# Allegro board 8880F5-0817_PLACEMENT.brd
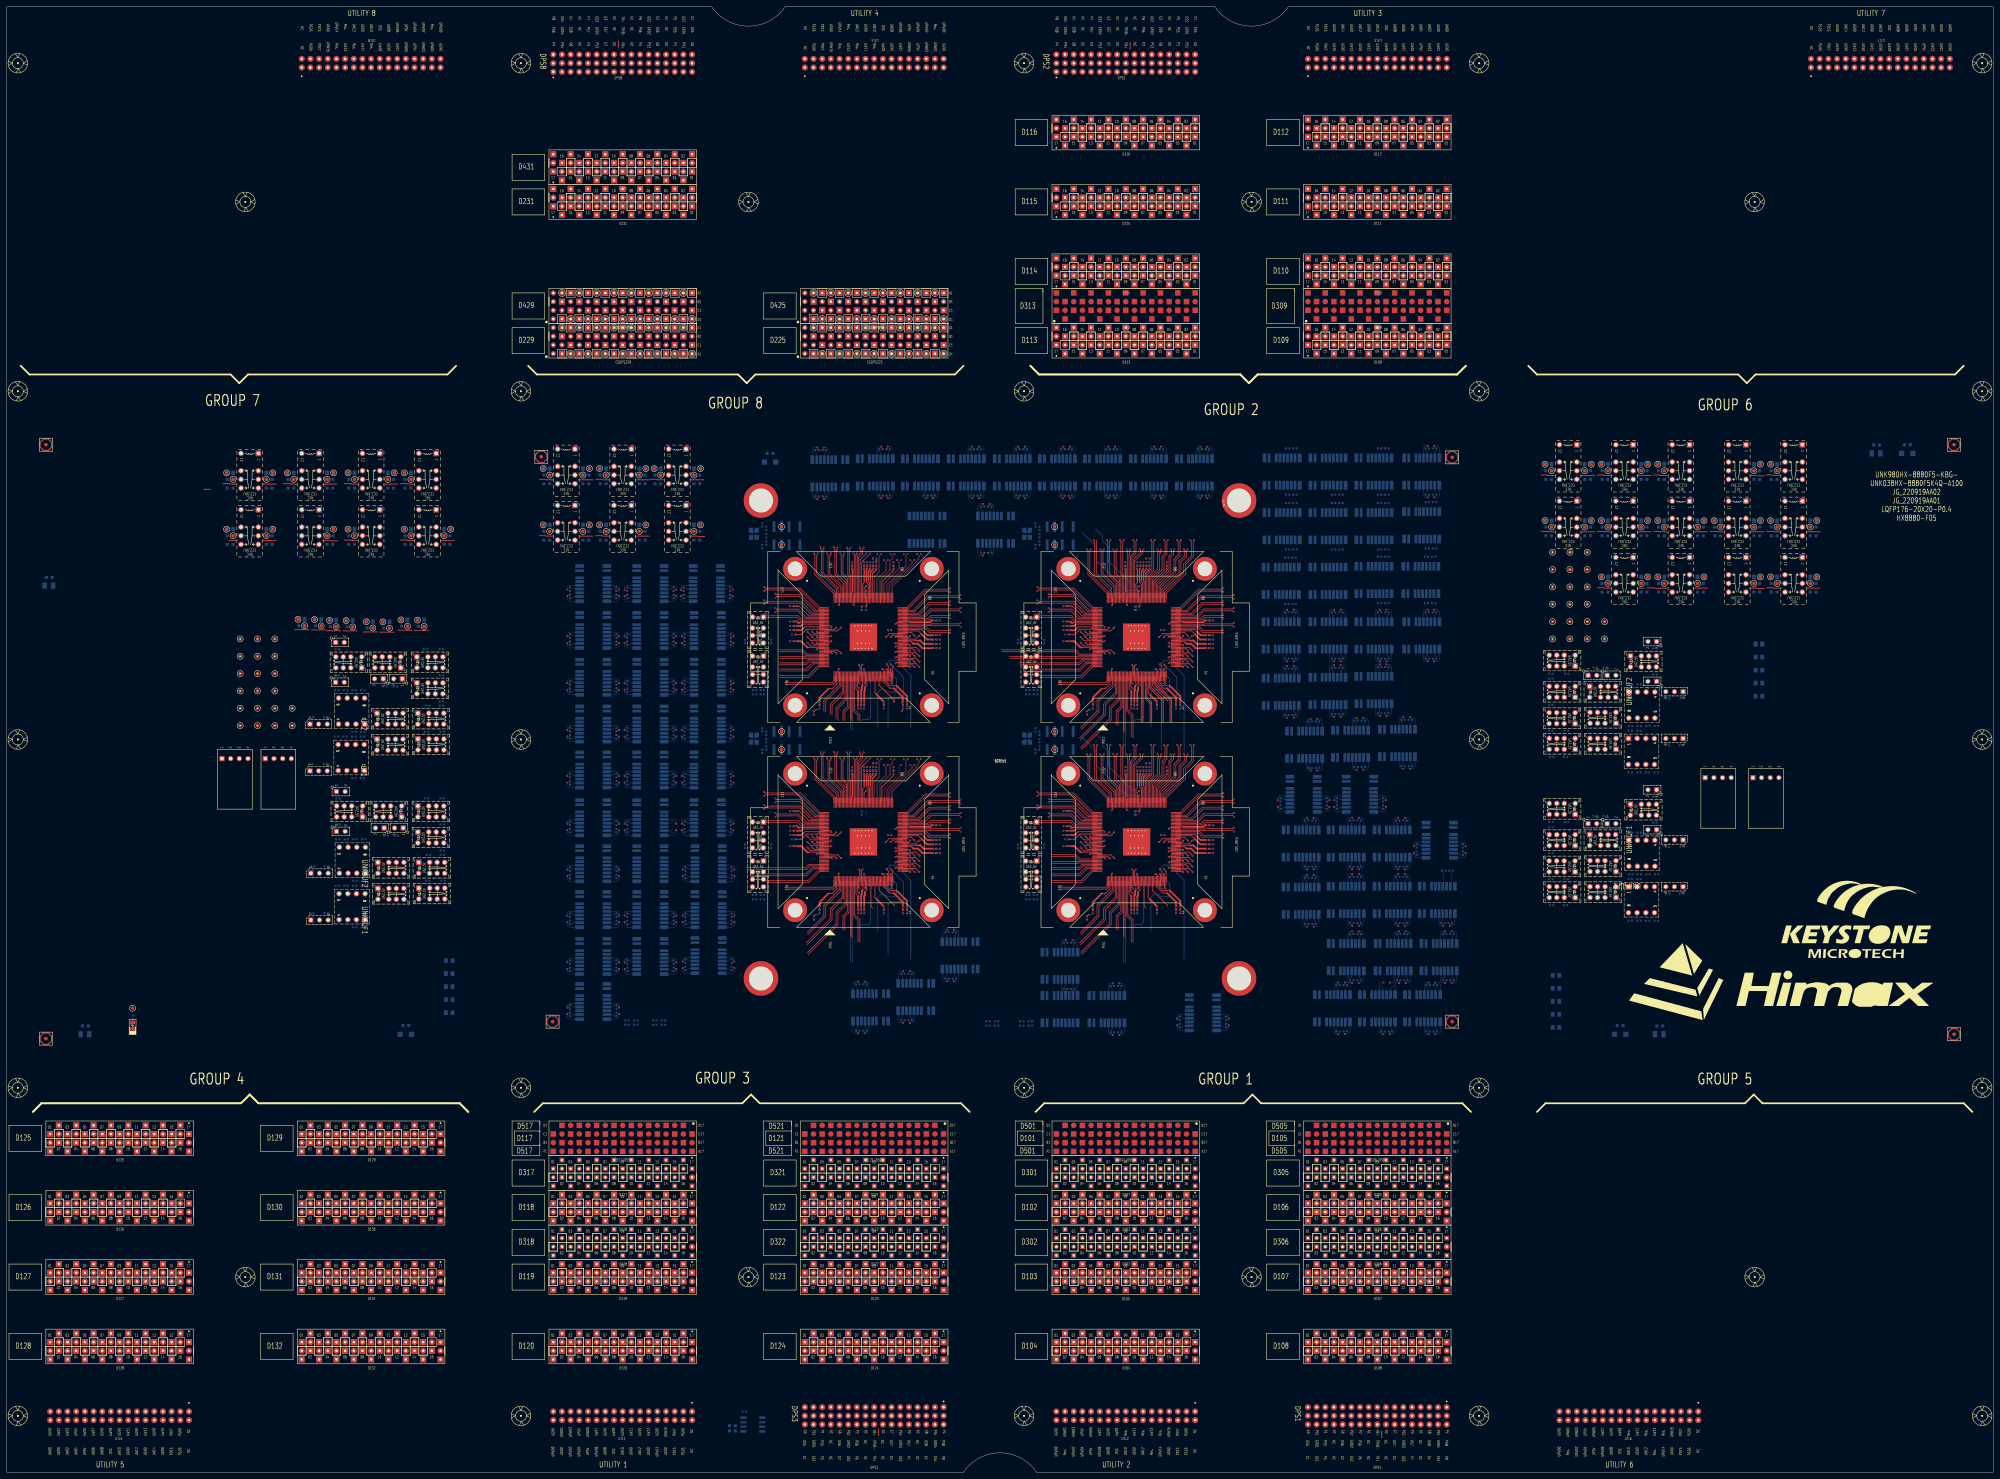
[diagram p0: board, top side]
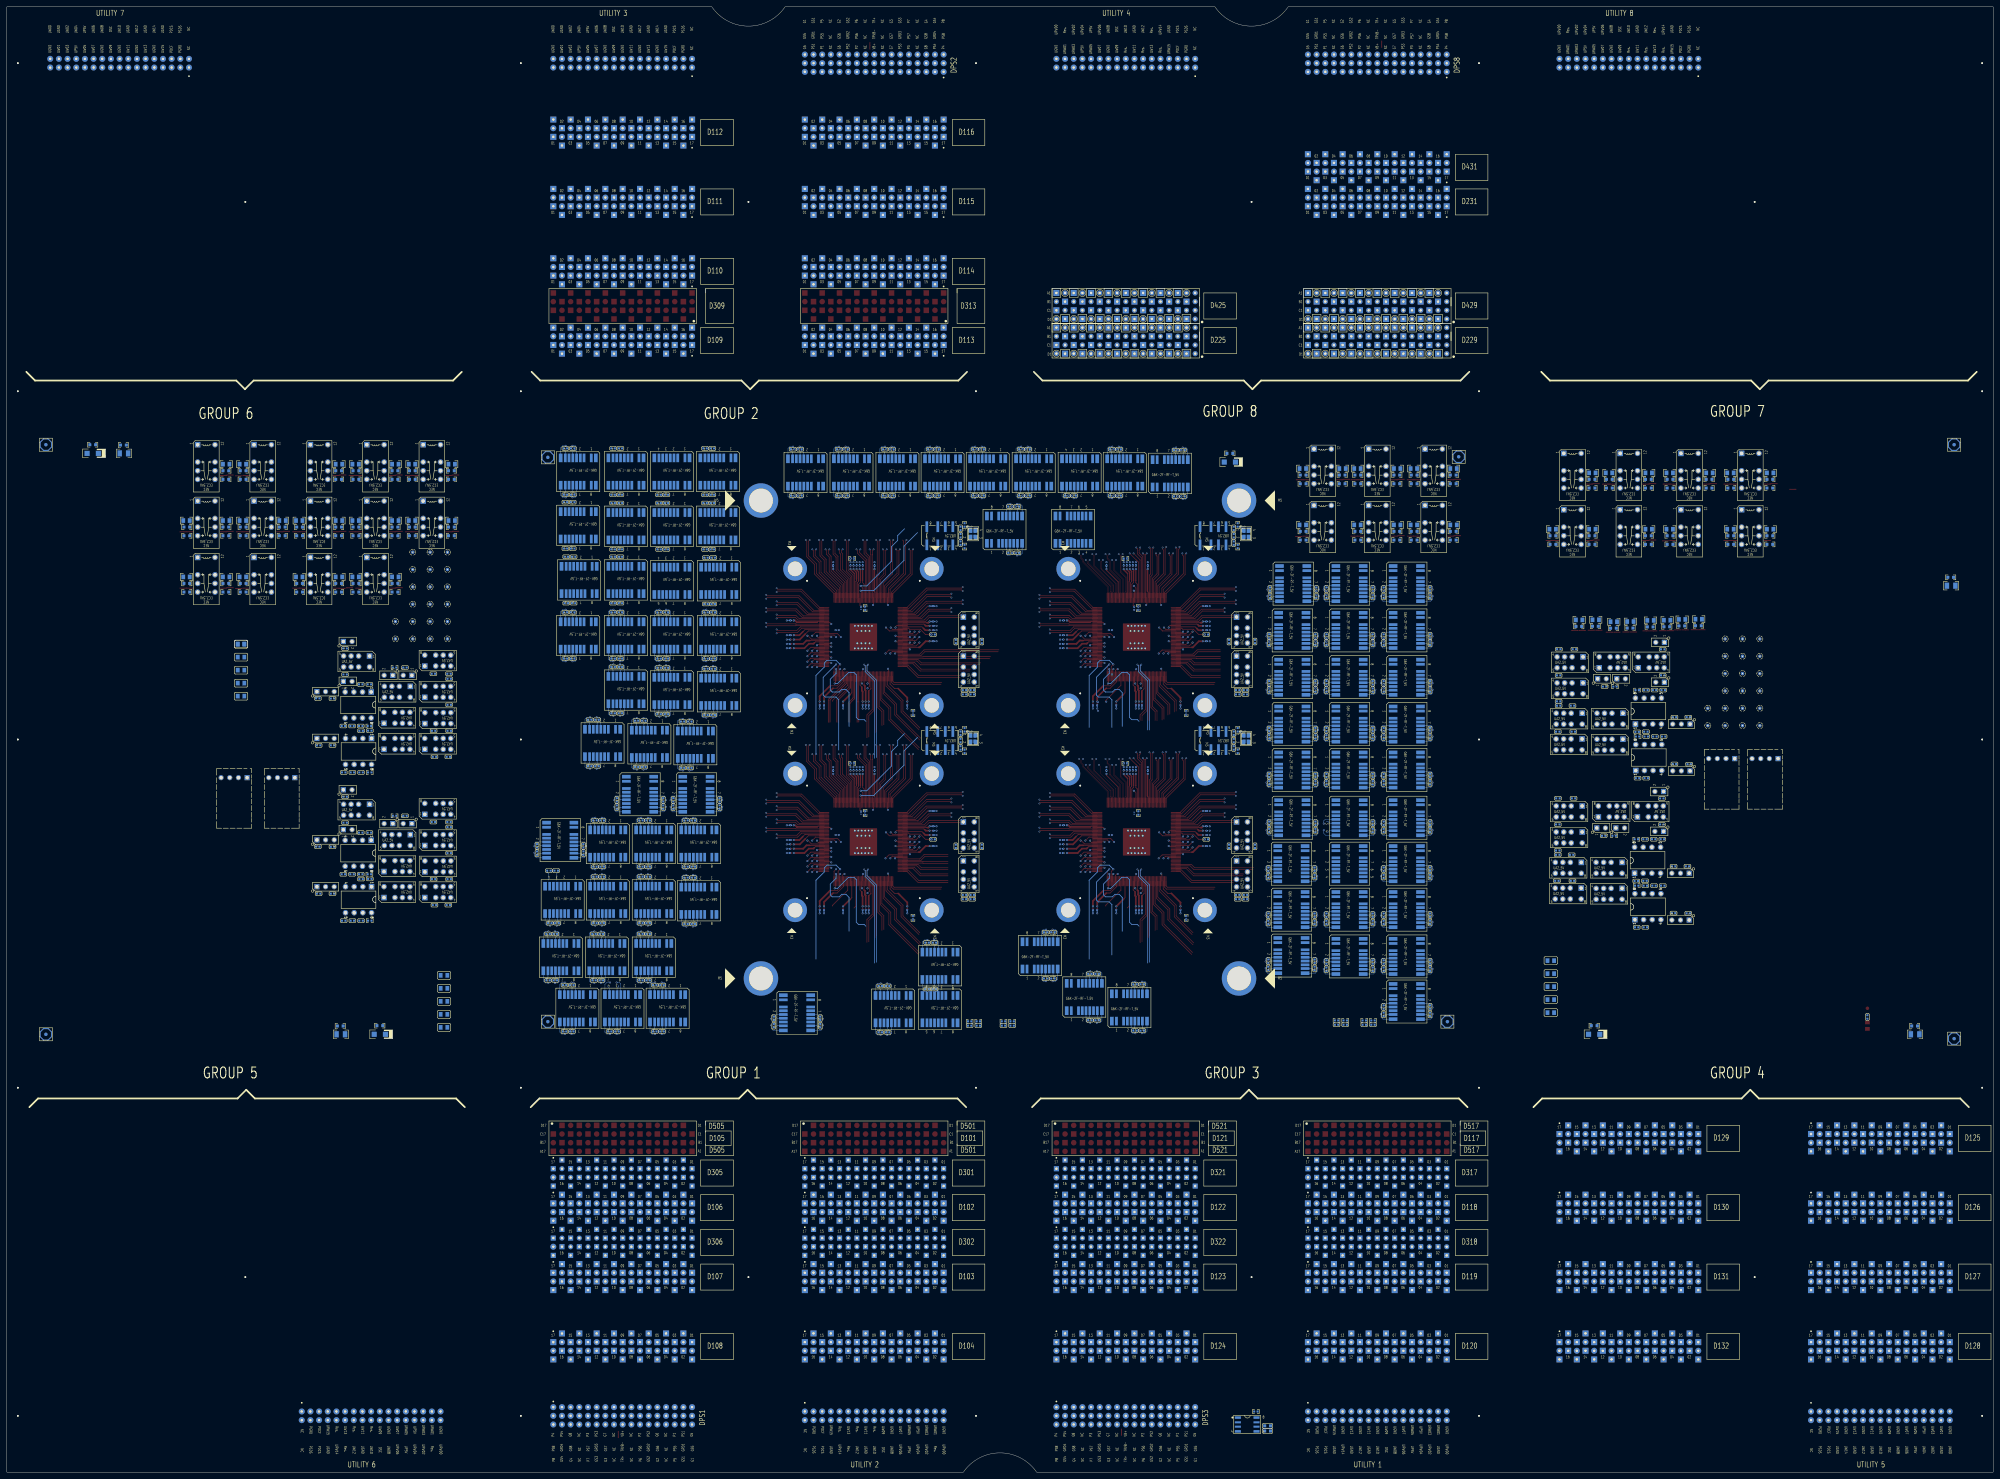
[diagram p1: board, bottom side, seen from below]

Outline 581.66 x 429.26 mm; copper layers: TOP, L02_DGND, L03_SIGNAL, L04_DGND, L05_SIGNAL, L06_DGND, L07_SIGNAL, L08_DGND, L09_SIGNAL, L10_DGND, L11_POWER, L12_DGND, L13_POWER, L14_DGND, L15_POWER, L16_DGND, L17_5V, L18_CBIT, L19_DGND, L20_POWER, L21_DGND, L22_POWER, L23_DGND, L24_POWER, L25_DGND, L26_SIGNAL, L27_DGND, L28_SIGNAL, L29_DGND, L30_SIGNAL, L31_DGND, L32_SIGNAL, L33_DGND, BOTTOM. Coordinates in mm from the lower left corner of the outline.

## Design rules (mm)
net group DIFFPAIR0: nets S1_2TX_100DCH007+ S1_2TX_100DCH007-
net group DIFFPAIR1: nets S1_2TX_100DCH006+ S1_2TX_100DCH006-
net group DIFFPAIR2: nets S1_2TX_100DCH005+ S1_2TX_100DCH005-
net group DIFFPAIR3: nets S1_2TX_100DCH004+ S1_2TX_100DCH004-
net group DIFFPAIR4: nets S1_2TX_100DCH003+ S1_2TX_100DCH003-
net group DIFFPAIR5: nets S1_2TX_100DCH002+ S1_2TX_100DCH002-
net group DIFFPAIR6: nets S1_2TX_100DCH001+ S1_2TX_100DCH001-
net group DIFFPAIR_85_1: nets S1_RX_85DCH001+ S1_RX_85DCH001-
net group DIFFPAIR_85_2: nets S1_RX_85DCH002+ S1_RX_85DCH002-
net group DIFFPAIR_85_3: nets S1_RX_85DCH003+ S1_RX_85DCH003-
net group DIFFPAIR_85_4: nets S1_RX_85DCH004+ S1_RX_85DCH004-

## Placement (name value [footprint] x y rotation side)
BD29  BD120-3A-S8  [FB0805]  129.54 134.62 180 bottom
BD30  BD120-3A-S8  [FB0805]  129.54 146.05 180 bottom
BD31  BD120-3A-S8  [FB0805]  129.54 142.24 0 bottom
BD32  BD120-3A-S8  [FB0805]  513.08 238.76 180 bottom
BD33  BD120-3A-S8  [FB0805]  513.08 242.57 180 bottom
BD34  BD120-3A-S8  [FB0805]  453.64 145.54 0 bottom
BD35  BD120-3A-S8  [FB0805]  453.64 137.92 180 bottom
BD36  BD120-3A-S8  [FB0805]  129.54 138.43 180 bottom
BD37  BD120-3A-S8  [FB0805]  453.64 130.3 180 bottom
BD38  BD120-3A-S8  [FB0805]  513.08 242.57 180 bottom
BD39  BD120-3A-S8  [FB0805]  453.64 141.73 0 bottom
BD40  BD120-3A-S8  [FB0805]  453.64 134.11 180 bottom
BD41  BD120-3A-S8  [FB0805]  513.08 234.95 180 bottom
BD42  BD120-3A-S8  [FB0805]  513.08 231.14 180 bottom
BD43  BD120-3A-S8  [FB0805]  513.08 227.33 180 bottom
BD44  BD120-3A-S8  [FB0805]  129.54 149.86 180 bottom
BR902  330-1-S4  [R0402]  36.83 133.35 270 bottom
C3  0.1U-16-X-S4-MU  [C0402]  184.15 132.33 180 bottom
C4  0.1U-16-X-S4-MU  [C0402]  181.61 132.33 180 bottom
C5  22P-50-N-S4-AVX  [C0402]  221.21 277.48 90 bottom
C6  22P-50-N-S4-AVX  [C0402]  221.21 271.16 270 bottom
C7  0.1U-16-X-S4-MU  [C0402]  110.74 230.12 0 bottom
C8  0.1U-16-X-S4-MU  [C0402]  104.14 215.5 180 bottom
C9  0.1U-16-X-S4-MU  [C0402]  104.24 229.1 180 bottom
CA1  NC/10U-10-X6S-S6-MU  [C0603]  186.05 292.1 0 bottom
CA2  NC/47U-10-X5R-S8-TDK  [C0805]  186.16 294 0 bottom
CA3  NC/10U-10-X6S-S6-MU  [C0603]  174.62 292.1 180 bottom
CA4  NC/47U-10-X5R-S8-TDK  [C0805]  174.52 294 180 bottom
CA5  NC/10U-10-X6S-S6-MU  [C0603]  117.47 290.83 180 bottom
CA6  NC/47U-10-X5R-S8-TDK  [C0805]  117.37 292.74 180 bottom
CA7  NC/10U-10-X6S-S6-MU  [C0603]  169.54 292.1 0 bottom
CA8  NC/47U-10-X5R-S8-TDK  [C0805]  169.65 294 0 bottom
CA9  NC/10U-10-X6S-S6-MU  [C0603]  158.11 292.1 180 bottom
CA10  NC/47U-10-X5R-S8-TDK  [C0805]  158.01 294 180 bottom
CA11  NC/10U-10-X6S-S6-MU  [C0603]  186.05 275.59 0 bottom
CA12  NC/47U-10-X5R-S8-TDK  [C0805]  186.16 277.5 0 bottom
CA13  NC/47U-10-X5R-S8-TDK  [C0805]  202.16 294 0 bottom
CA14  NC/10U-10-X6S-S6-MU  [C0603]  202.06 292.1 0 bottom
CA15  NC/47U-10-X5R-S8-TDK  [C0805]  190.53 294 180 bottom
CA16  NC/10U-10-X6S-S6-MU  [C0603]  190.63 292.1 180 bottom
CA17  NC/47U-10-X5R-S8-TDK  [C0805]  169.65 277.5 0 bottom
CA18  NC/10U-10-X6S-S6-MU  [C0603]  169.54 275.59 0 bottom
CA19  NC/47U-10-X5R-S8-TDK  [C0805]  100.34 249.52 180 bottom
CA20  NC/10U-10-X6S-S6-MU  [C0603]  100.44 247.61 180 bottom
CA21  10U-10-X6S-S6-MU  [C0603]  186.05 289.56 0 bottom
CA22  10U-10-X6S-S6-MU  [C0603]  174.62 289.56 180 bottom
CA23  10U-10-X6S-S6-MU  [C0603]  117.47 288.29 180 bottom
CA24  10U-10-X6S-S6-MU  [C0603]  169.54 289.56 0 bottom
CA25  10U-10-X6S-S6-MU  [C0603]  158.11 289.56 180 bottom
CA26  10U-10-X6S-S6-MU  [C0603]  186.05 273.05 0 bottom
CA27  10U-10-X6S-S6-MU  [C0603]  202.06 289.56 0 bottom
CA28  10U-10-X6S-S6-MU  [C0603]  190.63 289.56 180 bottom
CA29  10U-10-X6S-S6-MU  [C0603]  169.54 273.05 0 bottom
CA30  NC/47U-10-X5R-S8-TDK  [C0805]  95.47 249.57 180 bottom
CA31  10U-10-X6S-S6-MU  [C0603]  95.57 247.66 180 bottom
CA32  NC/10U-10-X6S-S6-MU  [C0603]  202.06 275.59 0 bottom
CA33  NC/47U-10-X5R-S8-TDK  [C0805]  202.16 277.5 0 bottom
CA34  10U-10-X6S-S6-MU  [C0603]  202.06 273.05 0 bottom
CA35  NC/10U-10-X6S-S6-MU  [C0603]  174.62 275.59 180 bottom
CA36  NC/47U-10-X5R-S8-TDK  [C0805]  174.52 277.5 180 bottom
CA37  10U-10-X6S-S6-MU  [C0603]  174.62 273.05 180 bottom
CA38  NC/10U-10-X6S-S6-MU  [C0603]  158.11 275.59 180 bottom
CA39  NC/47U-10-X5R-S8-TDK  [C0805]  158.01 277.5 180 bottom
CA40  10U-10-X6S-S6-MU  [C0603]  158.11 273.05 180 bottom
CB1  0.1U-25-X-S6  [C0603]  116.84 130.81 0 bottom
CB2  10U-16-T-SA  [CODE_A]  116.84 128.27 0 bottom
CB3  0.1U-25-X-S6  [C0603]  472.44 130.81 0 bottom
CB4  10U-16-T-SA  [CODE_A]  472.44 128.27 0 bottom
CB5  0.1U-25-X-S6  [C0603]  556.51 300.99 0 bottom
CB6  10U-16-T-SA  [CODE_A]  556.51 298.45 0 bottom
CB7  0.1U-25-X-S6  [C0603]  223.52 298.45 0 bottom
CB8  10U-16-T-SA  [CODE_A]  223.52 295.91 0 bottom
CB9  0.1U-25-X-S6  [C0603]  23.01 130.71 0 bottom
CB10  10U-25-X7R-SA  [C1206]  22.86 128.27 0 bottom
CB11  0.1U-25-X-S6  [C0603]  484.02 130.71 0 bottom
CB12  10U-25-X7R-SA  [C1206]  483.87 128.27 0 bottom
CB13  0.1U-25-X-S6  [C0603]  547.52 300.89 0 bottom
CB14  10U-25-X7R-SA  [C1206]  547.37 298.45 0 bottom
CB15  0.1U-25-X-S6  [C0603]  12.45 262.13 0 bottom
CB16  10U-25-X7R-SA  [C1206]  12.3 259.69 0 bottom
CB19  0.1U-25-X7R-S4-MU  [C0402]  215.9 17.78 180 bottom
CC1  0.47U-10-X6S-S2-TY  [C0201]  237.98 224.12 90 bottom
CC2  4.7U-10-X6T-S4-MU  [C0402]  236.32 222.4 270 bottom
CC4  0.47U-10-X6S-S2-TY  [C0201]  229.81 247.93 0 bottom
CC6  0.47U-10-X6S-S2-TY  [C0201]  250.17 224.12 90 bottom
CC7  0.47U-10-X6S-S2-TY  [C0201]  229.81 246.66 0 bottom
CC8  0.47U-10-X6S-S2-TY  [C0201]  263.63 224.12 90 bottom
CC9  0.47U-10-X6S-S2-TY  [C0201]  254.61 266.16 270 bottom
CC11  0.47U-10-X6S-S2-TY  [C0201]  251.06 224.12 90 bottom
CC13  0.47U-10-X6S-S2-TY  [C0201]  256.77 224.12 90 bottom
CC15  4.7U-2.5-X6S-S2-MU  [C0201]  259.65 264.95 90 bottom
CC16  NC/4.7U-2.5-X6S-S2-MU  [C0201]  271.64 249.5 0 bottom
CC17  4.7U-2.5-X6S-S2-MU  [C0201]  229.81 253.69 0 bottom
CC19  0.47U-10-X6S-S2-TY  [C0201]  252.83 266.16 270 bottom
CC20  4.7U-10-X6T-S4-MU  [C0402]  254.11 267.66 0 bottom
CC22  0.47U-10-X6S-S2-TY  [C0201]  251.05 266.16 270 bottom
CC23  4.7U-10-X6T-S4-MU  [C0402]  250.34 253.09 270 bottom
CC25  0.47U-10-X6S-S2-TY  [C0201]  272.85 245.18 180 bottom
CC26  0.47U-10-X6S-S2-TY  [C0201]  253.72 266.16 270 bottom
CC27  0.47U-10-X6S-S2-TY  [C0201]  272.85 249.5 180 bottom
CC28  0.47U-10-X6S-S2-TY  [C0201]  259.65 266.16 270 bottom
CC29  0.47U-10-X6S-S2-TY  [C0201]  231.03 253.69 180 bottom
CC30  0.47U-10-X6S-S2-TY  [C0201]  229.81 243.41 0 bottom
CC31  0.47U-10-X6S-S2-TY  [C0201]  249.28 224.12 90 bottom
CC32  0.47U-10-X6S-S2-TY  [C0201]  262.36 224.12 90 bottom
CC33  0.47U-10-X6S-S2-TY  [C0201]  272.85 243.91 180 bottom
CC34  0.47U-10-X6S-S2-TY  [C0201]  251.94 266.16 270 bottom
CC35  0.47U-10-X6S-S2-TY  [C0201]  272.85 241.37 180 bottom
CC36  0.47U-10-X6S-S2-TY  [C0201]  272.85 242.64 180 bottom
CC37  0.47U-10-X6S-S2-TY  [C0201]  247.57 264.95 90 bottom
CC38  NC/4.7U-2.5-X6S-S2-MU  [C0201]  247.57 266.16 270 bottom
CC39  0.47U-10-X6S-S2-TY  [C0201]  231.03 249.2 180 bottom
CC40  4.7U-2.5-X6S-S2-MU  [C0201]  258.5 246.67 180 bottom
CC41  4.7U-2.5-X6S-S2-MU  [C0201]  229.81 249.2 0 bottom
CC42  4.7U-2.5-X6S-S2-MU  [C0201]  251.54 253.03 90 bottom
CD1  0.1U-10-X7R-S2-MU  [C0201]  237.98 225.34 270 top
CD3  0.1U-10-X7R-S2-MU  [C0201]  271.64 241.37 0 top
CD4  0.1U-10-X7R-S2-MU  [C0201]  254.61 264.95 90 top
CD5  0.1U-10-X7R-S2-MU  [C0201]  263.63 225.34 270 top
CD6  0.1U-10-X7R-S2-MU  [C0201]  231.03 246.66 180 top
CD7  0.1U-10-X7R-S2-MU  [C0201]  271.64 242.64 0 top
CD8  0.1U-10-X7R-S2-MU  [C0201]  251.06 225.34 270 top
CD9  0.1U-10-X7R-S2-MU  [C0201]  256.77 225.34 270 top
CD10  0.1U-10-X7R-S2-MU  [C0201]  271.64 249.5 0 top
CD11  0.1U-10-X7R-S2-MU  [C0201]  259.65 264.95 90 top
CD12  0.1U-10-X7R-S2-MU  [C0201]  231.03 253.69 180 top
CD13  0.1U-10-X7R-S2-MU  [C0201]  252.83 264.95 90 top
CD14  0.1U-10-X7R-S2-MU  [C0201]  251.05 264.95 90 top
CD15  0.1U-10-X7R-S2-MU  [C0201]  271.64 245.18 0 top
CD16  0.1U-10-X7R-S2-MU  [C0201]  253.72 264.95 90 top
CD17  0.1U-10-X7R-S2-MU  [C0201]  231.03 247.93 180 top
CD18  0.1U-10-X7R-S2-MU  [C0201]  251.94 264.95 90 top
CD19  0.1U-10-X7R-S2-MU  [C0201]  231.03 243.41 180 top
CD20  0.1U-10-X7R-S2-MU  [C0201]  271.64 243.91 0 top
CD21  0.1U-10-X7R-S2-MU  [C0201]  262.36 225.34 270 top
CD22  0.1U-10-X7R-S2-MU  [C0201]  249.28 225.34 270 top
CD23  0.1U-10-X7R-S2-MU  [C0201]  250.17 225.34 270 top
CD24  0.1U-10-X7R-S2-MU  [C0201]  247.57 264.95 90 top
CD25  0.1U-10-X7R-S2-MU  [C0201]  231.03 249.2 180 top
CSDPS225  V93K_CSDPS_DPS32  [PG_VG93K_PF_DPS32_G8D225]  254 331.47 0 top
CSDPS229  V93K_CSDPS_DPS32  [PG_VG93K_PF_DPS32_G8D229]  180.34 331.47 0 top
CSDPS425  V93K_CSDPS_DPS32  [PG_VG93K_PF_DPS32_G8D425]  254 341.63 0 top
CSDPS429  V93K_CSDPS_DPS32  [PG_VG93K_PF_DPS32_G8D429]  180.34 341.63 0 top
D101/D501  V93K_PS1600 HD  [PG_VG93K_F_HSM_G1D101_501_ND]  327.66 97.79 0 top
D102  V93K_CH  [PG_VG93K_F_G1D102]  327.66 77.47 0 top
D103  V93K_CH  [PG_VG93K_F_G1D103]  327.66 57.15 0 top
D104  V93K_CH  [PG_VG93K_F_G1D104]  327.66 36.83 0 top
D105/D505  V93K_PS1600 HD  [PG_VG93K_F_HSM_G1D105_505_ND]  401.32 97.79 0 top
D106  V93K_CH  [PG_VG93K_F_G1D106]  401.32 77.47 0 top
D107  V93K_CH  [PG_VG93K_F_G1D107]  401.32 57.15 0 top
D108  V93K_CH  [PG_VG93K_F_G1D108]  401.32 36.83 0 top
D109  V93K_CH  [PG_VG93K_F_G2D109]  401.32 331.47 0 top
D110  V93K_CH  [PG_VG93K_F_G2D110]  401.32 351.79 0 top
D111  V93K_CH  [PG_VG93K_F_G2D111]  401.32 372.11 0 top
D112  V93K_CH  [PG_VG93K_F_G2D112]  401.32 392.43 0 top
D113  V93K_CH  [PG_VG93K_F_G2D113]  327.66 331.47 0 top
D114  V93K_CH  [PG_VG93K_F_G2D114]  327.66 351.79 0 top
D115  V93K_CH  [PG_VG93K_F_G2D115]  327.66 372.11 0 top
D116  V93K_CH  [PG_VG93K_F_G2D116]  327.66 392.43 0 top
D117/D517  V93K_PS1600 HD  [PG_VG93K_F_HSM_G3D117_517_ND]  180.34 97.79 0 top
D118  V93K_CH  [PG_VG93K_F_G3D118]  180.34 77.47 0 top
D119  V93K_CH  [PG_VG93K_F_G3D119]  180.34 57.15 0 top
D120  V93K_CH  [PG_VG93K_F_G3D120]  180.34 36.83 0 top
D121/D521  V93K_PS1600 HD  [PG_VG93K_F_HSM_G3D121_521_ND]  254 97.79 0 top
D122  V93K_CH  [PG_VG93K_F_G3D122]  254 77.47 0 top
D123  V93K_CH  [PG_VG93K_F_G3D123]  254 57.15 0 top
D124  V93K_CH  [PG_VG93K_F_G3D124]  254 36.83 0 top
D125  V93K_CH  [PG_VG93K_F_G4D125]  33.02 97.79 0 top
D126  V93K_CH  [PG_VG93K_F_G4D126]  33.02 77.47 0 top
D127  V93K_CH  [PG_VG93K_F_G4D127]  33.02 57.15 0 top
D128  V93K_CH  [PG_VG93K_F_G4D128]  33.02 36.83 0 top
D129  V93K_CH  [PG_VG93K_F_G4D129]  106.68 97.79 0 top
D130  V93K_CH  [PG_VG93K_F_G4D130]  106.68 77.47 0 top
D131  V93K_CH  [PG_VG93K_F_G4D131]  106.68 57.15 0 top
D132  V93K_CH  [PG_VG93K_F_G4D132]  106.68 36.83 0 top
D231  V93K_CH  [PG_VG93K_F_G8D231]  180.34 372.11 0 top
D301  V93K_CH  [PG_VG93K_F_G1D301]  327.66 87.63 0 top
D302  V93K_CH  [PG_VG93K_F_G1D302]  327.66 67.31 0 top
D305  V93K_CH  [PG_VG93K_F_G1D305]  401.32 87.63 0 top
D306  V93K_CH  [PG_VG93K_F_G1D306]  401.32 67.31 0 top
D309  V93K_PSSL  [PG_VG93K_F_PSSL_G2D309_ND]  401.32 341.63 0 top
D313  V93K_PSSL  [PG_VG93K_F_PSSL_G2D313_ND]  327.66 341.63 0 top
D317  V93K_CH  [PG_VG93K_F_G3D317]  180.34 87.63 0 top
D318  V93K_CH  [PG_VG93K_F_G3D318]  180.34 67.31 0 top
D321  V93K_CH  [PG_VG93K_F_G3D321]  254 87.63 0 top
D322  V93K_CH  [PG_VG93K_F_G3D322]  254 67.31 0 top
D431  V93K_CH  [PG_VG93K_F_G8D431]  180.34 382.27 0 top
DPS1  V93K_DPS  [PG_VG93K_F_G1DPS1]  401.32 16.51 0 top
DPS2  V93K_DPS  [PG_VG93K_F_G2DPS2]  327.66 412.75 0 top
DPS3  V93K_DPS  [PG_VG93K_F_G3DPS3]  254 16.51 0 top
DPS8  V93K_DPS  [PG_VG93K_F_G8DPS8]  180.34 412.75 0 top
FD1  -  [FD_040_V2]  159.82 131.98 0 top
FD2  -  [FD_040_V2]  423.24 131.98 0 top
FD3  -  [FD_040_V2]  423.24 297.28 0 top
FD4  -  [FD_040_V2]  156.51 297.46 0 top
FD5  -  [FD_040_V2]  159.82 131.98 180 bottom
FD6  -  [FD_040_V2]  423.24 131.98 180 bottom
FD7  -  [FD_040_V2]  423.24 297.28 180 bottom
FD8  -  [FD_040_V2]  156.51 297.46 180 bottom
FD9  -  [FD_040_V2]  570.23 128.27 180 bottom
FD10  -  [FD_040_V2]  570.23 300.99 0 top
FD11  -  [FD_040_V2]  570.23 300.99 180 bottom
FD12  -  [FD_040_V2]  11.43 300.99 0 top
FD13  -  [FD_040_V2]  11.43 300.99 180 bottom
FD14  -  [FD_040_V2]  11.43 127 0 top
FD15  -  [FD_040_V2]  11.43 127 180 bottom
FD16  -  [FD_040_V2]  570.23 128.27 0 top
GND1  TP01  [TP_040_T]  173.57 294 0 top
GND2  TP01  [TP_040_T]  187.11 294 180 top
GND3  TP01  [TP_040_T]  116.42 292.74 0 top
GND4  TP01  [TP_040_T]  157.06 294 0 top
GND5  TP01  [TP_040_T]  170.6 294 180 top
GND6  TP01  [TP_040_T]  173.57 277.5 0 top
GND7  TP01  [TP_040_T]  203.11 294 180 top
GND8  TP01  [TP_040_T]  189.58 294 0 top
GND9  TP01  [TP_040_T]  170.6 277.5 180 top
GND10  TP01  [TP_040_T]  99.36 249.46 0 top
GND11  TP01  [TP_040_T]  94.49 249.52 0 top
GND12  TP01  [TP_040_T]  203.11 277.5 180 top
GND13  TP01  [TP_040_T]  187.11 277.5 180 top
GND14  TP01  [TP_040_T]  157.06 277.5 0 top
HX8880-F05  REF-CODE-CHIP  [CHIP_CODE]  559.05 279.65 0 top
J1  HDR-2X1-M  [JP_2P_100]  110.24 232.41 270 bottom
J2  HDR-3X1-M  [JP_3P_100]  88.76 205.43 90 bottom
J3  HDR-3X1-M  [JP_3P_100]  88.76 219.15 90 bottom
J4  HDR-2X1-M  [JP_2P_100]  96.27 231.39 90 bottom
J5  HDR-2X1-M  [JP_2P_100]  96.27 243.08 90 bottom
JG_220919AA01  REF-CODE-SOCKET  [SOCKET_CODE]  559.05 284.73 0 top
JG_220919AA02  REF-CODE-SOCKET  [SOCKET_CODE]  559.05 287.27 0 top
K1  G6K-2F-RF-T-5V-SPECIAL  [RL_G6K2FRT_8P_5V_GR]  171.7 219.2 270 bottom
K2  G6K-2F-RF-T-5V-SPECIAL  [RL_G6K2FRT_8P_5V_GR]  205.23 232.92 270 bottom
K3  G6K-2F-RF-T-5V-SPECIAL  [RL_G6K2FRT_8P_5V_GR]  294.39 292.86 0 bottom
K4  G6K-2F-RF-T-5V-SPECIAL  [RL_G6K2FRT_8P_5V_GR]  307.59 292.86 0 bottom
K5  G6K-2F-RF-T-5V-SPECIAL  [RL_G6K2FRT_8P_5V_GR]  347.73 292.86 0 bottom
K6  G6K-2F-RF-T-5V-SPECIAL  [RL_G6K2FRT_8P_5V_GR]  334.26 292.86 0 bottom
K7  G6K-2F-RF-T-5V-SPECIAL  [RL_G6K2FRT_8P_5V_GR]  320.8 292.86 0 bottom
K8  G6K-2F-RF-T-5V-SPECIAL  [RL_G6K2FRT_8P_5V_GR]  267.46 292.86 0 bottom
K9  UA2-5NJ-A-V3  [RL_NECUA2_5V_V3]  219.96 235.46 90 bottom
K10  UA2-5NJ-A-V3  [RL_NECUA2_5V_V3]  111.76 237.24 0 bottom
K11  G6K-2F-RF-T-5V-SPECIAL  [RL_G6K2FRT_8P_5V_GR]  289.56 276.1 180 bottom
K12  UA2-5NJ-A-V3  [RL_NECUA2_5V_V3]  219.96 246.89 90 bottom
K13  UA2-5NJ-A-V3  [RL_NECUA2_5V_V3]  123.7 229.62 180 bottom
K14  UA2-5NJ-A-V3  [RL_NECUA2_5V_V3]  112.01 220.73 180 bottom
K15  UA2-5NJ-A-V3  [RL_NECUA2_5V_V3]  123.99 213.19 180 bottom
K16  G6K-2F-RF-T-5V-SPECIAL  [RL_G6K2FRT_8P_5V_GR]  241.05 292.61 180 bottom
K17  G6K-2F-RF-T-5V-SPECIAL  [RL_G6K2FRT_8P_5V_GR]  254.25 292.86 0 bottom
K18  UB2-5NU-B  [RL_NECUB2_5V]  228.45 274.32 0 bottom
K19  UA2-5NJ-A-V3  [RL_NECUA2_5V_V3]  112.01 213.11 180 bottom
K20  UA2-5NJ-A-V3  [RL_NECUA2_5V_V3]  123.95 220.73 180 bottom
K21  G6K-2F-RF-T-5V-SPECIAL  [RL_G6K2FRT_8P_5V_GR]  280.92 292.86 0 bottom
K22  G6K-2F-RF-T-5V-SPECIAL  [RL_G6K2FRT_8P_5V_GR]  205.23 246.63 270 bottom
K23  G6K-2F-RF-T-5V-SPECIAL  [RL_G6K2FRT_8P_5V_GR]  188.47 232.92 270 bottom
K24  G6K-2F-RF-T-5V-SPECIAL  [RL_G6K2FRT_8P_5V_GR]  171.7 232.92 270 bottom
K25  G6K-2F-RF-T-5V-SPECIAL  [RL_G6K2FRT_8P_5V_GR]  204.98 260.35 270 bottom
K26  G6K-2F-RF-T-5V-SPECIAL  [RL_G6K2FRT_8P_5V_GR]  188.47 246.63 270 bottom
K27  G6K-2F-RF-T-5V-SPECIAL  [RL_G6K2FRT_8P_5V_GR]  171.7 246.63 270 bottom
K28  UA2-5NJ-A-V3  [RL_NECUA2_5V_V3]  100.33 237.24 0 bottom
K29  G6K-2F-RF-T-5V-SPECIAL  [RL_G6K2FRT_8P_5V_GR]  171.7 260.35 270 bottom
K30  G6K-2F-RF-T-5V-SPECIAL  [RL_G6K2FRT_8P_5V_GR]  188.47 260.35 270 bottom
K31  EC2-5NJ-A  [RL_NECEC2_10P_5V]  196.34 276.86 90 bottom
K33  NC/UA2-5NJ-A-V3  [RL_NECUA2_5V_V3]  123.7 237.24 180 bottom
K34  EC2-5NJ-A  [RL_NECEC2_10P_5V]  180.34 293.37 90 bottom
K36  EC2-5NJ-A  [RL_NECEC2_10P_5V]  123.19 292.1 90 bottom
K37  EC2-5NJ-A  [RL_NECEC2_10P_5V]  163.83 293.37 90 bottom
K39  EC2-5NJ-A  [RL_NECEC2_10P_5V]  180.34 276.86 90 bottom
K40  EC2-5NJ-A  [RL_NECEC2_10P_5V]  196.34 293.37 90 bottom
K42  EC2-5NJ-A  [RL_NECEC2_10P_5V]  163.83 276.86 90 bottom
K43  G6K-2F-RF-T-5V-SPECIAL  [RL_G6K2FRT_8P_5V_GR]  269.49 276.1 180 bottom
LD902  LDG-2-S8  [LED_0805]  36.83 130.81 90 top
LOGO1  -  [LOGO_KT_KSMT]  538.48 154.94 0 top
LOGO2  LOGO_HX_Himax  [LOGO_HX_HIMAX]  518.16 138.43 0 top
LQFP176-20X20-P0.4  REF-CODE-CHIP  [CHIP_CODE]  559.05 282.19 0 top
NOREF  -  []  450.03 210.36 0 top
NOREF#2  -  []  167.7 145.93 0 top
NOREF#3  -  []  167.7 134.07 90 top
NOREF#4  -  []  398.65 249.11 0 top
NOREF#5  -  []  182.57 199.39 90 top
NOREF#6  -  []  397.8 163.09 90 top
NOREF#7  -  []  247.25 265.56 90 top
NOREF#8  -  []  182.57 185.42 0 top
NOREF#9  -  []  112.41 222.33 0 top
NOREF#10  -  []  392.66 192.88 90 top
NOREF#11  -  []  256.77 223.82 90 top
NOREF#12  -  []  167.7 241.43 90 top
NOREF#13  -  []  401.89 180.15 0 top
NOREF#14  -  []  314.33 168.13 90 top
NOREF#15  -  []  394.66 290.39 90 top
NOREF#16  -  []  298.24 288.86 0 top
NOREF#17  -  []  108.27 178.64 0 top
NOREF#18  -  []  128.24 171.1 0 top
NOREF#19  -  []  420.15 131.44 90 top
NOREF#20  -  []  398.65 225.11 0 top
NOREF#21  -  []  400.79 154.88 0 top
NOREF#22  -  []  468.01 171.53 0 top
NOREF#23  -  []  66.26 287.84 90 top
NOREF#24  -  []  400.85 249.11 0 top
NOREF#25  -  []  394.05 287.22 0 top
NOREF#26  -  []  405.93 240.56 90 top
NOREF#27  -  []  231.15 219.63 90 top
NOREF#28  -  []  376.98 241.11 0 top
NOREF#29  -  []  404.24 146.88 0 top
NOREF#30  -  []  410.27 257.37 0 top
NOREF#31  -  []  272.25 249.82 0 top
NOREF#32  -  []  381.2 242.38 90 top
NOREF#33  -  []  230.41 253.37 90 top
NOREF#34  -  []  392.24 193.43 0 top
NOREF#35  -  []  367.13 287.22 0 top
NOREF#36  -  []  167.7 241.43 0 top
NOREF#37  -  []  274.67 286.96 0 top
NOREF#38  -  []  310.43 188.88 0 top
NOREF#39  -  []  392.24 199.18 90 top
NOREF#40  -  []  404.15 257.37 0 top
NOREF#41  -  []  242.23 233.13 90 top
NOREF#42  -  []  409.99 146.93 90 top
NOREF#43  -  []  320.83 194.63 0 top
NOREF#44  -  []  106.76 222.88 0 top
NOREF#45  -  []  177.33 133.47 90 top
NOREF#46  -  []  211.11 173.86 90 top
NOREF#47  -  []  128.21 178.64 0 top
NOREF#48  -  []  166.06 243.9 90 top
NOREF#49  -  []  286.55 288.31 90 top
NOREF#50  -  []  310.43 254.01 0 top
NOREF#51  -  []  397.3 209.36 0 top
NOREF#52  -  []  271.34 243.91 0 top
NOREF#53  -  []  306.83 269.63 90 top
NOREF#54  -  []  346.27 135.17 90 top
NOREF#55  -  []  118.7 188.08 0 top
NOREF#56  -  []  184.47 151.68 90 top
NOREF#57  -  []  182.82 175.58 90 top
NOREF#58  -  []  352.93 288.86 90 top
NOREF#59  -  []  297.83 174.63 90 top
NOREF#60  -  []  223.56 245.29 90 top
NOREF#61  -  []  453.88 230.2 0 top
NOREF#62  -  []  194.09 214.75 90 top
NOREF#63  -  []  232.25 271.67 90 top
NOREF#64  -  []  230.73 189.2 0 top
NOREF#65  -  []  465.45 290.38 90 top
NOREF#66  -  []  271.04 244.23 0 top
NOREF#67  -  []  184.47 151.68 90 top
NOREF#68  -  []  247.25 205.55 0 top
NOREF#69  -  []  414.82 281.37 0 top
NOREF#70  -  []  222.11 180.71 0 top
NOREF#71  -  []  327.57 264.65 90 top
NOREF#72  -  []  209.23 191.22 90 top
NOREF#73  -  []  253.72 205.86 90 top
NOREF#74  -  []  381.74 232.85 0 top
NOREF#75  -  []  310.43 188.88 90 top
NOREF#76  -  []  185.2 276.04 90 top
NOREF#77  -  []  392.73 171.64 0 top
NOREF#78  -  []  229.51 249.2 0 top
NOREF#79  -  []  263.63 225.04 90 top
NOREF#80  -  []  326.43 288.41 90 top
NOREF#81  -  []  199.59 189.04 90 top
NOREF#82  -  []  215.96 237.06 0 top
NOREF#83  -  []  256.45 224.72 0 top
NOREF#84  -  []  200.98 260.9 90 top
NOREF#85  -  []  329.28 223.82 90 top
NOREF#86  -  []  208.98 259.8 90 top
NOREF#87  -  []  472.86 174.55 90 top
NOREF#88  -  []  88.64 247.45 90 top
NOREF#89  -  []  415.1 163.64 0 top
NOREF#90  -  []  230.73 187.93 0 top
NOREF#91  -  []  299.59 288.86 90 top
NOREF#92  -  []  201.49 163.2 90 top
NOREF#93  -  []  201.23 227.72 0 top
NOREF#94  -  []  392.04 289.12 90 top
NOREF#95  -  []  394 217.36 0 top
NOREF#96  -  []  392.47 224.4 90 top
NOREF#97  -  []  297.41 213.24 0 top
NOREF#98  -  []  331.62 265.55 0 top
NOREF#99  -  []  256.77 165.04 90 top
NOREF#100  -  []  465.81 171.53 0 top
NOREF#101  -  []  262.36 165.04 90 top
NOREF#102  -  []  318.32 131.64 0 top
NOREF#103  -  []  461.96 174.55 0 top
NOREF#104  -  []  300.36 188.49 0 top
NOREF#105  -  []  215.96 248.49 0 top
NOREF#106  -  []  384.59 179.7 90 top
NOREF#107  -  []  84.04 287.84 90 top
NOREF#108  -  []  333.4 205.55 0 top
NOREF#109  -  []  342.04 224.74 0 top
NOREF#110  -  []  239.33 176.03 90 top
NOREF#111  -  []  200.98 260.9 90 top
NOREF#112  -  []  401.87 139.89 0 top
NOREF#113  -  []  115.61 211.51 90 top
NOREF#114  -  []  201.49 159.65 0 top
NOREF#115  -  []  118.45 231.77 0 top
NOREF#116  -  []  237.83 197.63 0 top
NOREF#117  -  []  167.7 138.47 90 top
NOREF#118  -  []  66.26 271.33 90 top
NOREF#119  -  []  398.65 289.12 0 top
NOREF#120  -  []  419.47 289.12 90 top
NOREF#121  -  []  304.61 131.64 0 top
NOREF#122  -  []  288.14 286.96 0 top
NOREF#123  -  []  528.1 259.9 90 top
NOREF#124  -  []  317.83 197.63 0 top
NOREF#125  -  []  475.04 239.09 0 top
NOREF#126  -  []  471.21 168.33 0 top
NOREF#127  -  []  218.16 248.49 0 top
NOREF#128  -  []  272.25 241.69 0 top
NOREF#129  -  []  184.47 173.11 90 top
NOREF#130  -  []  451.68 214.96 0 top
NOREF#131  -  []  419.9 272.92 90 top
NOREF#132  -  []  383.09 273.11 0 top
NOREF#133  -  []  167.7 132.72 90 top
NOREF#134  -  []  230.43 253.37 0 top
NOREF#135  -  []  351.58 288.86 0 top
NOREF#136  -  []  271.34 241.37 0 top
NOREF#137  -  []  412.62 297.12 0 top
NOREF#138  -  []  209.23 195.52 90 top
NOREF#139  -  []  167.7 206.29 90 top
NOREF#140  -  []  118.99 166.5 90 top
NOREF#141  -  []  309.05 271.67 0 top
NOREF#142  -  []  248.96 224.74 0 top
NOREF#143  -  []  309.21 183.09 0 top
NOREF#144  -  []  405.93 224.66 90 top
NOREF#145  -  []  272.25 244.86 90 top
NOREF#146  -  []  460.93 210.36 90 top
NOREF#147  -  []  371.48 249.11 0 top
NOREF#148  -  []  184.47 165.4 90 top
NOREF#149  -  []  459.28 168.33 90 top
NOREF#150  -  []  373.32 181.42 90 top
NOREF#151  -  []  172.08 275.14 90 top
NOREF#152  -  []  201.21 273.5 90 top
NOREF#153  -  []  396.28 163.69 90 top
NOREF#154  -  []  165.8 254 90 top
NOREF#155  -  []  301.56 182.89 0 top
NOREF#156  -  []  118.33 289.48 90 top
NOREF#157  -  []  261.42 135.74 90 top
NOREF#158  -  []  317.66 164.74 0 top
NOREF#159  -  []  410.78 131.89 0 top
NOREF#160  -  []  310.43 253.37 90 top
NOREF#161  -  []  406.65 239.21 90 top
NOREF#162  -  []  396.55 273.11 0 top
NOREF#163  -  []  167.7 247.18 90 top
NOREF#164  -  []  201.23 200.54 90 top
NOREF#165  -  []  272.24 189.18 90 top
NOREF#166  -  []  352.55 243.91 0 top
NOREF#167  -  []  106.18 160.58 90 top
NOREF#168  -  []  342.36 225.04 90 top
NOREF#169  -  []  199.59 171.96 0 top
NOREF#170  -  []  271.04 189.82 0 top
NOREF#171  -  []  182.57 212.85 90 top
NOREF#172  -  []  373.83 192.28 0 top
NOREF#173  -  []  300.01 288.41 90 top
NOREF#174  -  []  405.93 272.56 90 top
NOREF#175  -  []  209.23 189.02 90 top
NOREF#176  -  []  392.47 240.66 90 top
NOREF#177  -  []  398.53 161.74 90 top
NOREF#178  -  []  230.41 247.61 90 top
NOREF#179  -  []  379.48 222.7 90 top
NOREF#180  -  []  194.09 160.4 90 top
NOREF#181  -  []  459.28 236.14 0 top
NOREF#182  -  []  175.7 141.67 90 top
NOREF#183  -  []  118.7 195.7 0 top
NOREF#184  -  []  378.33 217.11 0 top
NOREF#185  -  []  366.88 222.7 0 top
NOREF#186  -  []  369.63 289.12 0 top
NOREF#187  -  []  124.1 238.84 0 top
NOREF#188  -  []  317.66 224.72 0 top
NOREF#189  -  []  192.47 148.38 90 top
NOREF#190  -  []  238.3 164.74 90 top
NOREF#191  -  []  249.6 224.74 90 top
NOREF#192  -  []  451.68 186.77 0 top
NOREF#193  -  []  182.82 189.04 90 top
NOREF#194  -  []  310.73 189.2 0 top
NOREF#195  -  []  192.47 154.88 90 top
NOREF#196  -  []  351.04 245.5 0 top
NOREF#197  -  []  253.53 140.14 0 top
NOREF#198  -  []  182.57 158.5 90 top
NOREF#199  -  []  342.68 223.52 90 top
NOREF#200  -  []  471.11 186.77 0 top
NOREF#201  -  []  405.93 288.57 90 top
NOREF#202  -  []  237.98 223.82 90 top
NOREF#203  -  []  378.75 256.66 90 top
NOREF#204  -  []  108.27 171.02 0 top
NOREF#205  -  []  406.65 287.22 90 top
NOREF#206  -  []  401.87 194.18 90 top
NOREF#207  -  []  346.27 135.17 90 top
NOREF#208  -  []  333.72 204.65 90 top
NOREF#209  -  []  310.83 164.63 0 top
NOREF#210  -  []  250.5 288.86 0 top
NOREF#211  -  []  286.81 272.1 0 top
NOREF#212  -  []  400.24 198.08 90 top
NOREF#213  -  []  419.9 240.66 90 top
NOREF#214  -  []  383.73 198.08 90 top
NOREF#215  -  []  166.06 230.19 90 top
NOREF#216  -  []  384.36 131.89 0 top
NOREF#217  -  []  310.73 193.69 0 top
NOREF#218  -  []  310.43 243.09 90 top
NOREF#219  -  []  339.33 205.56 90 top
NOREF#220  -  []  122.15 187.53 0 top
NOREF#221  -  []  410.52 289.12 0 top
NOREF#222  -  []  209.23 232.37 90 top
NOREF#223  -  []  303.56 245.29 90 top
NOREF#224  -  []  118.96 179.19 0 top
NOREF#225  -  []  230.41 248.88 90 top
NOREF#226  -  []  451.68 214.96 0 top
NOREF#227  -  []  295.19 271.65 90 top
NOREF#228  -  []  108.01 195.15 0 top
NOREF#229  -  []  495.08 257.36 90 top
NOREF#230  -  []  329.85 164.72 0 top
NOREF#231  -  []  377.48 273.16 90 top
NOREF#232  -  []  478.57 291.28 90 top
NOREF#233  -  []  84.04 290.38 90 top
NOREF#234  -  []  400.85 297.12 0 top
NOREF#235  -  []  331.62 205.56 0 top
NOREF#236  -  []  321.82 167.13 90 top
NOREF#237  -  []  407.67 129.99 90 top
NOREF#238  -  []  327.25 265.55 0 top
NOREF#239  -  []  216.96 180.71 0 top
NOREF#240  -  []  339.33 265.56 0 top
NOREF#241  -  []  383.09 241.11 0 top
NOREF#242  -  []  199.59 243.9 90 top
NOREF#243  -  []  378.58 273.11 90 top
NOREF#244  -  []  218.16 237.06 0 top
NOREF#245  -  []  234.7 298.51 0 top
NOREF#246  -  []  127.3 235.64 90 top
NOREF#247  -  []  201.49 176.66 90 top
NOREF#248  -  []  294.94 296.86 0 top
NOREF#249  -  []  408.63 242.38 90 top
NOREF#250  -  []  201.23 233.47 90 top
NOREF#251  -  []  209.49 155.13 90 top
NOREF#252  -  []  405.5 257.37 90 top
NOREF#253  -  []  330.74 164.74 0 top
NOREF#254  -  []  343.31 224.74 0 top
NOREF#255  -  []  229.21 248.88 0 top
NOREF#256  -  []  351.04 189.82 0 top
NOREF#257  -  []  412.62 273.37 0 top
NOREF#258  -  []  167.7 214 0 top
NOREF#259  -  []  463.61 179.15 0 top
NOREF#260  -  []  200.98 258.7 90 top
NOREF#261  -  []  332.83 264.65 90 top
NOREF#262  -  []  329.85 224.72 0 top
NOREF#263  -  []  175.8 174.36 90 top
NOREF#264  -  []  210.6 255.9 90 top
NOREF#265  -  []  310.41 186.34 90 top
NOREF#266  -  []  419.64 256.82 90 top
NOREF#267  -  []  393.19 287.22 90 top
NOREF#268  -  []  313.22 288.31 90 top
NOREF#269  -  []  404.4 225.16 90 top
NOREF#270  -  []  229.51 253.69 0 top
NOREF#271  -  []  465.81 214.96 0 top
NOREF#272  -  []  471.59 130.36 90 top
NOREF#273  -  []  383.09 257.11 0 top
NOREF#274  -  []  230.43 183.09 90 top
NOREF#275  -  []  327.25 265.56 0 top
NOREF#276  -  []  467.51 230.2 0 top
NOREF#277  -  []  215.96 248.49 0 top
NOREF#278  -  []  461.86 182.17 90 top
NOREF#279  -  []  461.86 187.32 0 top
NOREF#280  -  []  399.64 144.98 0 top
NOREF#281  -  []  402.14 146.88 0 top
NOREF#282  -  []  220.36 177.06 0 top
NOREF#283  -  []  184.47 219.75 90 top
NOREF#284  -  []  290.64 288.86 0 top
NOREF#285  -  []  167.7 174.46 90 top
NOREF#286  -  []  192.47 209.49 90 top
NOREF#287  -  []  249.85 224.72 0 top
NOREF#288  -  []  175.8 133.97 90 top
NOREF#289  -  []  385.19 273.11 0 top
NOREF#290  -  []  230.43 247.61 90 top
NOREF#291  -  []  229.21 247.61 0 top
NOREF#292  -  []  453.88 239.34 0 top
NOREF#293  -  []  473.6 162.62 90 top
NOREF#294  -  []  343.2 172.26 90 top
NOREF#295  -  []  109.96 238.84 0 top
NOREF#296  -  []  223.15 211.32 90 top
NOREF#297  -  []  352.55 249.5 0 top
NOREF#298  -  []  352.24 243.59 90 top
NOREF#299  -  []  310.43 187.61 90 top
NOREF#300  -  []  425.23 180.72 90 top
NOREF#301  -  []  184.47 247.18 90 top
NOREF#302  -  []  369.63 289.12 0 top
NOREF#303  -  []  451.68 230.2 0 top
NOREF#304  -  []  188.08 291.65 90 top
NOREF#305  -  []  393.19 239.21 90 top
NOREF#306  -  []  330.74 224.74 0 top
NOREF#307  -  []  230.73 246.66 0 top
NOREF#308  -  []  330.17 165.04 90 top
NOREF#309  -  []  383.09 257.11 0 top
NOREF#310  -  []  36.1 129.71 90 top
NOREF#311  -  []  383.09 241.11 0 top
NOREF#312  -  []  331.38 163.52 90 top
NOREF#313  -  []  201.23 242.78 90 top
NOREF#314  -  []  314.55 286.96 0 top
NOREF#315  -  []  201.49 161 90 top
NOREF#316  -  []  406.52 131.89 90 top
NOREF#317  -  []  405.5 241.11 90 top
NOREF#318  -  []  343.95 164.74 90 top
NOREF#319  -  []  400.24 202.38 90 top
NOREF#320  -  []  295.96 237.06 0 top
NOREF#321  -  []  396.55 241.11 0 top
NOREF#322  -  []  313.98 143.79 90 top
NOREF#323  -  []  327.25 265.56 90 top
NOREF#324  -  []  254.29 205.56 0 top
NOREF#325  -  []  461.96 174.55 0 top
NOREF#326  -  []  108.01 222.33 0 top
NOREF#327  -  []  201.4 254.6 90 top
NOREF#328  -  []  209.49 168.6 90 top
NOREF#329  -  []  272.55 181.37 0 top
NOREF#330  -  []  287.91 280.1 0 top
NOREF#331  -  []  165.8 144.78 0 top
NOREF#332  -  []  182.57 226.57 90 top
NOREF#333  -  []  390.53 180.15 0 top
NOREF#334  -  []  251.86 192.43 90 top
NOREF#335  -  []  317.05 288.86 0 top
NOREF#336  -  []  165.8 212.85 0 top
NOREF#337  -  []  423.61 182.42 90 top
NOREF#338  -  []  272.25 184.86 90 top
NOREF#339  -  []  166.06 135.19 90 top
NOREF#340  -  []  182.82 148.4 90 top
NOREF#341  -  []  373.68 232.6 0 top
NOREF#342  -  []  343.31 164.74 0 top
NOREF#343  -  []  419.9 272.82 90 top
NOREF#344  -  []  237.66 164.72 0 top
NOREF#345  -  []  254.29 265.55 0 top
NOREF#346  -  []  394.05 271.21 0 top
NOREF#347  -  []  409.17 297.12 0 top
NOREF#348  -  []  420.15 131.34 90 top
NOREF#349  -  []  369.38 224.6 0 top
NOREF#350  -  []  271.04 184.23 0 top
NOREF#351  -  []  222.11 240.71 0 top
NOREF#352  -  []  251.54 192.73 90 top
NOREF#353  -  []  414.57 265.37 0 top
NOREF#354  -  []  271.34 181.37 0 top
NOREF#355  -  []  451.68 171.53 0 top
NOREF#356  -  []  201.23 241.43 90 top
NOREF#357  -  []  330.73 265.56 90 top
NOREF#358  -  []  295.96 188.49 0 top
NOREF#359  -  []  392.47 240.56 90 top
NOREF#360  -  []  468.01 214.96 0 top
NOREF#361  -  []  418.37 289.17 90 top
NOREF#362  -  []  250.23 132.14 0 top
NOREF#363  -  []  377.32 188.15 0 top
NOREF#364  -  []  337.09 164.74 90 top
NOREF#365  -  []  192.47 259.8 90 top
NOREF#366  -  []  230.83 224.63 0 top
NOREF#367  -  []  175.7 177.76 90 top
NOREF#368  -  []  229.51 193.69 0 top
NOREF#369  -  []  272.55 243.91 0 top
NOREF#370  -  []  341.63 233.83 90 top
NOREF#371  -  []  113.08 129.54 0 top
NOREF#372  -  []  334.61 265.86 90 top
NOREF#373  -  []  247.25 264.35 90 top
NOREF#374  -  []  221.56 190.49 0 top
NOREF#375  -  []  175.8 160.9 90 top
NOREF#376  -  []  330.49 164.74 90 top
NOREF#377  -  []  331.62 264.35 90 top
NOREF#378  -  []  371.48 265.11 0 top
NOREF#379  -  []  407.71 217.61 0 top
NOREF#380  -  []  271.04 181.69 0 top
NOREF#381  -  []  115.61 191.95 0 top
NOREF#382  -  []  378.75 224.05 90 top
NOREF#383  -  []  422.95 163.69 90 top
NOREF#384  -  []  413.51 207.71 90 top
NOREF#385  -  []  378.33 257.11 90 top
NOREF#386  -  []  286.55 288.41 90 top
NOREF#387  -  []  422.7 163.64 0 top
NOREF#388  -  []  167.7 260.9 90 top
NOREF#389  -  []  75.98 290.38 90 top
NOREF#390  -  []  396.55 241.11 0 top
NOREF#391  -  []  298.13 214.06 0 top
NOREF#392  -  []  412.36 209.61 90 top
NOREF#393  -  []  459.28 227 0 top
NOREF#394  -  []  327.25 265.55 0 top
NOREF#395  -  []  478.57 257.36 90 top
NOREF#396  -  []  166.06 216.47 90 top
NOREF#397  -  []  456.04 222.5 0 top
NOREF#398  -  []  511.59 257.36 90 top
NOREF#399  -  []  118.74 215.34 0 top
NOREF#400  -  []  230.73 189.2 0 top
NOREF#401  -  []  272.25 244.23 0 top
NOREF#402  -  []  263.71 288.86 0 top
NOREF#403  -  []  404.15 241.11 0 top
NOREF#404  -  []  220.36 237.06 0 top
NOREF#405  -  []  397.8 146.43 90 top
NOREF#406  -  []  108.27 171.02 0 top
NOREF#407  -  []  419.47 273.37 90 top
NOREF#408  -  []  192.47 230.17 90 top
NOREF#409  -  []  242.23 173.13 90 top
NOREF#410  -  []  408.63 274.64 90 top
NOREF#411  -  []  379 288.57 90 top
NOREF#412  -  []  329.28 165.04 90 top
NOREF#413  -  []  272.24 242.32 90 top
NOREF#414  -  []  250.49 223.52 90 top
NOREF#415  -  []  352.24 189.18 90 top
NOREF#416  -  []  334.29 265.56 90 top
NOREF#417  -  []  449.99 174.46 0 top
NOREF#418  -  []  155.57 291.65 90 top
NOREF#419  -  []  194.09 201.29 90 top
NOREF#420  -  []  419.9 154.88 0 top
NOREF#421  -  []  259.88 288.41 90 top
NOREF#422  -  []  201.23 247.18 90 top
NOREF#423  -  []  423.2 146.88 0 top
NOREF#424  -  []  252.51 265.56 0 top
NOREF#425  -  []  459.28 192.71 90 top
NOREF#426  -  []  394.05 223.21 0 top
NOREF#427  -  []  378.75 240.66 90 top
NOREF#428  -  []  222.11 192.14 0 top
NOREF#429  -  []  374.88 217.11 0 top
NOREF#430  -  []  369.63 273.11 0 top
NOREF#431  -  []  528.1 257.36 90 top
NOREF#432  -  []  107.02 171.57 0 top
NOREF#433  -  []  329.6 223.52 90 top
NOREF#434  -  []  252.6 288.86 0 top
NOREF#435  -  []  75.98 287.84 90 top
NOREF#436  -  []  299.81 213.69 90 top
NOREF#437  -  []  118.33 273.87 90 top
NOREF#438  -  []  230.73 183.41 0 top
NOREF#439  -  []  331.06 223.82 90 top
NOREF#440  -  []  463.61 222.58 0 top
NOREF#441  -  []  396.03 180.15 0 top
NOREF#442  -  []  409.17 281.37 0 top
NOREF#443  -  []  318.3 164.74 90 top
NOREF#444  -  []  310.73 249.2 0 top
NOREF#445  -  []  303.84 288.86 0 top
NOREF#446  -  []  331.22 193.63 0 top
NOREF#447  -  []  368.03 232.6 0 top
NOREF#448  -  []  253.72 265.86 90 top
NOREF#449  -  []  371.48 257.11 0 top
NOREF#450  -  []  259.33 265.56 90 top
NOREF#451  -  []  310.43 248.88 90 top
NOREF#452  -  []  209.23 230.17 90 top
NOREF#453  -  []  341.63 255.43 90 top
NOREF#454  -  []  246.23 233.13 0 top
NOREF#455  -  []  472.86 210.36 90 top
NOREF#456  -  []  310.41 248.88 90 top
NOREF#457  -  []  165.8 212.85 90 top
NOREF#458  -  []  386.46 131.89 0 top
NOREF#459  -  []  352.25 183.59 90 top
NOREF#460  -  []  234.33 228.13 90 top
NOREF#461  -  []  184.47 241.43 90 top
NOREF#462  -  []  184.47 147.28 90 top
NOREF#463  -  []  108.01 214.71 0 top
NOREF#464  -  []  367.73 290.39 90 top
NOREF#465  -  []  348.28 296.86 0 top
NOREF#466  -  []  354.27 131.87 90 top
NOREF#467  -  []  390.53 163.64 0 top
NOREF#468  -  []  450.03 225.6 0 top
NOREF#469  -  []  167.7 227.72 90 top
NOREF#470  -  []  119.95 222.33 0 top
NOREF#471  -  []  215.96 177.06 0 top
NOREF#472  -  []  456.08 171.53 0 top
NOREF#473  -  []  310.43 188.88 90 top
NOREF#474  -  []  396.55 289.12 0 top
NOREF#475  -  []  168.13 186.02 90 top
NOREF#476  -  []  406.44 154.88 0 top
NOREF#477  -  []  240.94 151.63 90 top
NOREF#478  -  []  379 272.56 90 top
NOREF#479  -  []  417.2 163.64 0 top
NOREF#480  -  []  177.33 187.32 90 top
NOREF#481  -  []  369.63 273.11 0 top
NOREF#482  -  []  461.96 210.36 0 top
NOREF#483  -  []  98.78 195.15 0 top
NOREF#484  -  []  184.47 201.89 90 top
NOREF#485  -  []  199.33 212.85 90 top
NOREF#486  -  []  210.86 214.75 90 top
NOREF#487  -  []  249.6 163.52 90 top
NOREF#488  -  []  461.96 166.93 0 top
NOREF#489  -  []  263.71 288.86 0 top
NOREF#490  -  []  417.7 154.88 0 top
NOREF#491  -  []  252.83 264.65 90 top
NOREF#492  -  []  165.8 199.39 90 top
NOREF#493  -  []  167.7 159.65 0 top
NOREF#494  -  []  302.11 180.71 0 top
NOREF#495  -  []  453.84 222.5 0 top
NOREF#496  -  []  336.77 165.04 90 top
NOREF#497  -  []  352.55 181.37 0 top
NOREF#498  -  []  424.98 146.43 90 top
NOREF#499  -  []  388.43 163.64 0 top
NOREF#500  -  []  351.34 181.37 0 top
NOREF#501  -  []  249.85 164.74 0 top
NOREF#502  -  []  184.47 174.46 90 top
NOREF#503  -  []  470.79 128.27 0 top
NOREF#504  -  []  460.93 225.6 90 top
NOREF#505  -  []  168.13 159.1 90 top
NOREF#506  -  []  272.25 189.18 90 top
NOREF#507  -  []  272.55 183.91 0 top
NOREF#508  -  []  167.7 178.86 90 top
NOREF#509  -  []  456.04 179.06 0 top
NOREF#510  -  []  124.35 195.15 0 top
NOREF#511  -  []  351.34 189.5 0 top
NOREF#512  -  []  121.9 238.84 0 top
NOREF#513  -  []  318.45 197.01 0 top
NOREF#514  -  []  298.16 237.06 0 top
NOREF#515  -  []  352.24 244.86 90 top
NOREF#516  -  []  336.45 164.74 0 top
NOREF#517  -  []  398.65 233.11 0 top
NOREF#518  -  []  263.71 288.86 0 top
NOREF#519  -  []  468.68 129.54 0 top
NOREF#520  -  []  239.33 176.03 0 top
NOREF#521  -  []  96.33 238.84 0 top
NOREF#522  -  []  352.25 243.59 90 top
NOREF#523  -  []  518.38 257.36 90 top
NOREF#524  -  []  165.8 199.39 0 top
NOREF#525  -  []  478.57 277.31 90 top
NOREF#526  -  []  392.04 224.85 90 top
NOREF#527  -  []  449.99 217.9 0 top
NOREF#528  -  []  175.7 205.19 90 top
NOREF#529  -  []  339.65 264.65 90 top
NOREF#530  -  []  393.19 271.21 90 top
NOREF#531  -  []  389.7 209.36 0 top
NOREF#532  -  []  339.89 288.41 90 top
NOREF#533  -  []  485.36 289.48 90 top
NOREF#534  -  []  298.13 274.06 0 top
NOREF#535  -  []  167.7 258.7 90 top
NOREF#536  -  []  470.71 183.57 90 top
NOREF#537  -  []  297.71 216.09 0 top
NOREF#538  -  []  386.53 148.15 90 top
NOREF#539  -  []  400.24 195.88 90 top
NOREF#540  -  []  295.96 188.49 0 top
NOREF#541  -  []  313.98 131.09 90 top
NOREF#542  -  []  98.53 238.84 0 top
NOREF#543  -  []  450.03 191.31 0 top
NOREF#544  -  []  237.66 164.74 0 top
NOREF#545  -  []  310.43 248.88 90 top
NOREF#546  -  []  246.67 288.16 90 top
NOREF#547  -  []  467.51 186.77 0 top
NOREF#548  -  []  166.06 175.58 90 top
NOREF#549  -  []  384.17 180.15 90 top
NOREF#550  -  []  315.82 129.74 0 top
NOREF#551  -  []  317.98 223.82 90 top
NOREF#552  -  []  250.73 265.55 0 top
NOREF#553  -  []  473.79 196.21 0 top
NOREF#554  -  []  201.23 192.32 90 top
NOREF#555  -  []  352.25 182.96 0 top
NOREF#556  -  []  284.79 272.65 90 top
NOREF#557  -  []  398.65 297.12 0 top
NOREF#558  -  []  263.63 223.82 90 top
NOREF#559  -  []  35.83 132.61 0 top
NOREF#560  -  []  460.93 191.31 90 top
NOREF#561  -  []  303.15 271.32 90 top
NOREF#562  -  []  262.34 143.19 0 top
NOREF#563  -  []  200.98 255.15 0 top
NOREF#564  -  []  351.04 242.96 0 top
NOREF#565  -  []  352.24 181.05 90 top
NOREF#566  -  []  396.55 225.11 0 top
NOREF#567  -  []  264.29 272.1 90 top
NOREF#568  -  []  167.7 227.72 0 top
NOREF#569  -  []  332.83 205.86 90 top
NOREF#570  -  []  192.47 222.95 90 top
NOREF#571  -  []  346.27 130.77 90 top
NOREF#572  -  []  327.25 205.55 0 top
NOREF#573  -  []  411.09 146.88 90 top
NOREF#574  -  []  310.43 183.09 0 top
NOREF#575  -  []  194.09 242.18 90 top
NOREF#576  -  []  184.47 192.32 90 top
NOREF#577  -  []  239.33 243.63 90 top
NOREF#578  -  []  201.23 204.09 90 top
NOREF#579  -  []  383.09 241.11 0 top
NOREF#580  -  []  392.47 256.56 90 top
NOREF#581  -  []  122.15 195.15 0 top
NOREF#582  -  []  124.61 178.64 0 top
NOREF#583  -  []  254.29 205.55 0 top
NOREF#584  -  []  412.24 144.98 90 top
NOREF#585  -  []  310.73 193.69 0 top
NOREF#586  -  []  387.39 265.11 0 top
NOREF#587  -  []  385.61 208.66 90 top
NOREF#588  -  []  254.29 265.56 0 top
NOREF#589  -  []  155.57 275.14 90 top
NOREF#590  -  []  217.83 174.63 90 top
NOREF#591  -  []  305.83 264.31 0 top
NOREF#592  -  []  321.35 296.86 0 top
NOREF#593  -  []  272.55 242.64 0 top
NOREF#594  -  []  332.83 204.65 90 top
NOREF#595  -  []  201.66 240.88 90 top
NOREF#596  -  []  253.72 264.65 90 top
NOREF#597  -  []  199.33 199.39 90 top
NOREF#598  -  []  247.25 265.56 0 top
NOREF#599  -  []  101.82 271.33 90 top
NOREF#600  -  []  112.67 171.02 0 top
NOREF#601  -  []  309.21 186.34 0 top
NOREF#602  -  []  166.06 203.01 90 top
NOREF#603  -  []  301.56 250.49 0 top
NOREF#604  -  []  245.15 288.66 90 top
NOREF#605  -  []  485.36 257.36 90 top
NOREF#606  -  []  327.25 264.35 90 top
NOREF#607  -  []  309.21 253.37 0 top
NOREF#608  -  []  250.73 205.55 0 top
NOREF#609  -  []  230.43 188.88 0 top
NOREF#610  -  []  351.34 245.18 0 top
NOREF#611  -  []  485.36 292.02 90 top
NOREF#612  -  []  352.24 241.05 90 top
NOREF#613  -  []  300.36 248.49 0 top
NOREF#614  -  []  375.73 193.43 90 top
NOREF#615  -  []  93.02 247.21 90 top
NOREF#616  -  []  475.04 195.66 0 top
NOREF#617  -  []  259.84 145.09 0 top
NOREF#618  -  []  199.59 216.47 90 top
NOREF#619  -  []  229.21 183.09 0 top
NOREF#620  -  []  451.64 179.06 0 top
NOREF#621  -  []  306.71 152.34 0 top
NOREF#622  -  []  309.51 193.69 0 top
NOREF#623  -  []  167.7 217.55 90 top
NOREF#624  -  []  481.96 276.41 90 top
NOREF#625  -  []  230.43 186.34 90 top
NOREF#626  -  []  252.83 205.86 90 top
NOREF#627  -  []  234.33 168.13 90 top
NOREF#628  -  []  259.65 204.65 90 top
NOREF#629  -  []  379.48 255.21 90 top
NOREF#630  -  []  182.82 216.47 90 top
NOREF#631  -  []  354.27 134.07 90 top
NOREF#632  -  []  309.51 246.66 0 top
NOREF#633  -  []  273.09 288.41 90 top
NOREF#634  -  []  376.23 209.11 0 top
NOREF#635  -  []  408.92 265.37 0 top
NOREF#636  -  []  342.36 165.04 90 top
NOREF#637  -  []  263.83 231.63 90 top
NOREF#638  -  []  400.34 194.68 90 top
NOREF#639  -  []  199.59 158.5 90 top
NOREF#640  -  []  230.73 186.66 0 top
NOREF#641  -  []  119.95 222.33 0 top
NOREF#642  -  []  175.8 256.4 90 top
NOREF#643  -  []  378.33 209.11 0 top
NOREF#644  -  []  317.98 163.82 90 top
NOREF#645  -  []  271.34 189.5 0 top
NOREF#646  -  []  413.75 171.64 0 top
NOREF#647  -  []  182.57 171.96 90 top
NOREF#648  -  []  468.01 179.15 0 top
NOREF#649  -  []  257.09 164.74 90 top
NOREF#650  -  []  411.26 163.09 90 top
NOREF#651  -  []  118.45 226.62 90 top
NOREF#652  -  []  184.47 165.4 90 top
NOREF#653  -  []  411.26 163.19 90 top
NOREF#654  -  []  279.7 155.38 0 top
NOREF#655  -  []  175.7 209.49 90 top
NOREF#656  -  []  419.47 241.11 90 top
NOREF#657  -  []  317.05 288.86 0 top
NOREF#658  -  []  420.62 287.22 90 top
NOREF#659  -  []  167.7 215.35 90 top
NOREF#660  -  []  252.51 205.56 90 top
NOREF#661  -  []  211.11 160.4 90 top
NOREF#662  -  []  184.47 145.93 0 top
NOREF#663  -  []  309.21 187.61 0 top
NOREF#664  -  []  511.59 291.28 90 top
NOREF#665  -  []  352.24 249.18 90 top
NOREF#666  -  []  393.19 255.21 90 top
NOREF#667  -  []  316.97 139.64 0 top
NOREF#668  -  []  229.05 211.67 0 top
NOREF#669  -  []  306.71 131.64 0 top
NOREF#670  -  []  392.47 288.67 90 top
NOREF#671  -  []  221.87 295.91 0 top
NOREF#672  -  []  251.38 224.74 90 top
NOREF#673  -  []  118.74 215.34 0 top
NOREF#674  -  []  331.06 165.04 90 top
NOREF#675  -  []  320.94 151.63 90 top
NOREF#676  -  []  257.09 223.52 90 top
NOREF#677  -  []  305.94 288.86 0 top
NOREF#678  -  []  383.73 195.88 90 top
NOREF#679  -  []  250.49 224.74 90 top
NOREF#680  -  []  396.55 225.11 0 top
NOREF#681  -  []  393.31 131.89 90 top
NOREF#682  -  []  127.55 191.95 90 top
NOREF#683  -  []  413.71 178.82 0 top
NOREF#684  -  []  219.81 273.69 90 top
NOREF#685  -  []  199.33 257.62 90 top
NOREF#686  -  []  546.67 300.44 90 top
NOREF#687  -  []  331.54 252.73 90 top
NOREF#688  -  []  309.21 246.34 0 top
NOREF#689  -  []  354.27 138.37 90 top
NOREF#690  -  []  351.04 181.69 0 top
NOREF#691  -  []  308.91 152.34 0 top
NOREF#692  -  []  260.6 286.96 90 top
NOREF#693  -  []  248.96 164.74 0 top
NOREF#694  -  []  199.59 158.5 0 top
NOREF#695  -  []  453.88 214.96 0 top
NOREF#696  -  []  252.6 296.86 0 top
NOREF#697  -  []  413.2 164.91 90 top
NOREF#698  -  []  473.6 206.05 90 top
NOREF#699  -  []  463.61 214.96 0 top
NOREF#700  -  []  251.62 205.55 0 top
NOREF#701  -  []  392.21 131.94 90 top
NOREF#702  -  []  331.62 205.55 0 top
NOREF#703  -  []  368.28 297.12 0 top
NOREF#704  -  []  311.44 288.86 0 top
NOREF#705  -  []  328.96 164.72 0 top
NOREF#706  -  []  388.43 146.88 0 top
NOREF#707  -  []  167.7 200.54 0 top
NOREF#708  -  []  229.21 186.34 0 top
NOREF#709  -  []  404.4 289.17 90 top
NOREF#710  -  []  385.19 257.11 0 top
NOREF#711  -  []  201.23 214 0 top
NOREF#712  -  []  209.49 162.1 90 top
NOREF#713  -  []  247.34 133.41 90 top
NOREF#714  -  []  339.89 288.31 90 top
NOREF#715  -  []  304.65 211.67 0 top
NOREF#716  -  []  388.43 180.15 0 top
NOREF#717  -  []  167.7 161 90 top
NOREF#718  -  []  403.41 209.61 0 top
NOREF#719  -  []  302.11 240.71 0 top
NOREF#720  -  []  341.63 195.43 90 top
NOREF#721  -  []  327.25 204.35 90 top
NOREF#722  -  []  297.71 276.09 0 top
NOREF#723  -  []  327.25 205.55 0 top
NOREF#724  -  []  339.33 265.56 90 top
NOREF#725  -  []  368.03 265.11 0 top
NOREF#726  -  []  94.68 234.24 0 top
NOREF#727  -  []  385.19 289.12 0 top
NOREF#728  -  []  354.37 130.67 90 top
NOREF#729  -  []  373.87 188.15 0 top
NOREF#730  -  []  373.32 164.66 90 top
NOREF#731  -  []  309.51 187.93 0 top
NOREF#732  -  []  406.95 131.44 90 top
NOREF#733  -  []  285.71 280.1 0 top
NOREF#734  -  []  462.06 277.31 90 top
NOREF#735  -  []  334.29 205.55 0 top
NOREF#736  -  []  250.17 163.82 90 top
NOREF#737  -  []  216.96 252.14 0 top
NOREF#738  -  []  412.62 289.12 0 top
NOREF#739  -  []  379.73 287.22 90 top
NOREF#740  -  []  177.33 146.68 90 top
NOREF#741  -  []  352.55 245.18 0 top
NOREF#742  -  []  302.11 142.44 0 top
NOREF#743  -  []  208.98 264.1 90 top
NOREF#744  -  []  127.84 167.9 90 top
NOREF#745  -  []  339.97 264.35 90 top
NOREF#746  -  []  272.55 249.5 0 top
NOREF#747  -  []  375.22 163.39 0 top
NOREF#748  -  []  209.59 174.36 90 top
NOREF#749  -  []  192.47 162.1 90 top
NOREF#750  -  []  127.55 184.33 90 top
NOREF#751  -  []  374.08 195.9 90 top
NOREF#752  -  []  184.47 258.7 90 top
NOREF#753  -  []  226.85 271.67 0 top
NOREF#754  -  []  399.07 208.81 90 top
NOREF#755  -  []  262.04 164.74 0 top
NOREF#756  -  []  420.62 239.21 90 top
NOREF#757  -  []  306.27 216.63 90 top
NOREF#758  -  []  263.2 172.26 90 top
NOREF#759  -  []  309.51 183.41 0 top
NOREF#760  -  []  192.47 150.58 90 top
NOREF#761  -  []  184.47 244.98 90 top
NOREF#762  -  []  337.9 246.99 0 top
NOREF#763  -  []  298.49 288.91 90 top
NOREF#764  -  []  271.82 134.74 90 top
NOREF#765  -  []  415.1 163.64 0 top
NOREF#766  -  []  410.52 289.12 0 top
NOREF#767  -  []  376.15 192.88 90 top
NOREF#768  -  []  373.68 249.11 0 top
NOREF#769  -  []  383.09 224.85 0 top
NOREF#770  -  []  377.23 273.11 0 top
NOREF#771  -  []  337.09 163.52 90 top
NOREF#772  -  []  392.47 224.3 90 top
NOREF#773  -  []  215.96 188.49 0 top
NOREF#774  -  []  118.96 174.04 90 top
NOREF#775  -  []  387.08 188.15 0 top
NOREF#776  -  []  306.71 144.34 0 top
NOREF#777  -  []  182.57 199.39 0 top
NOREF#778  -  []  106.76 215.26 0 top
NOREF#779  -  []  352.24 183.59 90 top
NOREF#780  -  []  333.4 265.56 90 top
NOREF#781  -  []  230.73 249.2 0 top
NOREF#782  -  []  117.26 190.55 90 top
NOREF#783  -  []  352.24 182.32 90 top
NOREF#784  -  []  552.76 299.72 0 top
NOREF#785  -  []  451.64 179.06 0 top
NOREF#786  -  []  175.8 187.82 90 top
NOREF#787  -  []  528.1 273.87 90 top
NOREF#788  -  []  293.66 272.15 90 top
NOREF#789  -  []  297.41 213.24 90 top
NOREF#790  -  []  331.22 253.63 0 top
NOREF#791  -  []  352.55 182.64 0 top
NOREF#792  -  []  251.62 265.56 90 top
NOREF#793  -  []  300.74 286.96 90 top
NOREF#794  -  []  311.15 219.63 90 top
NOREF#795  -  []  336.45 164.72 0 top
NOREF#796  -  []  460.93 166.93 90 top
NOREF#797  -  []  184.47 233.47 90 top
NOREF#798  -  []  388.35 217.36 0 top
NOREF#799  -  []  372.72 161.49 0 top
NOREF#800  -  []  209.49 148.63 90 top
NOREF#801  -  []  396.55 257.37 0 top
NOREF#802  -  []  75.98 273.87 90 top
NOREF#803  -  []  167.7 159.65 90 top
NOREF#804  -  []  398.53 178.25 90 top
NOREF#805  -  []  226.85 211.67 0 top
NOREF#806  -  []  308.36 262.16 45 top
NOREF#807  -  []  383.09 273.11 0 top
NOREF#808  -  []  259.97 264.35 90 top
NOREF#809  -  []  254.61 205.86 90 top
NOREF#810  -  []  351.34 249.5 0 top
NOREF#811  -  []  192.47 182.06 90 top
NOREF#812  -  []  337.9 186.35 90 top
NOREF#813  -  []  351.34 241.37 0 top
NOREF#814  -  []  352.25 185.5 0 top
NOREF#815  -  []  450.03 234.74 0 top
NOREF#816  -  []  385.18 209.11 90 top
NOREF#817  -  []  390.59 195.9 90 top
NOREF#818  -  []  330.73 265.55 0 top
NOREF#819  -  []  312.46 144.39 90 top
NOREF#820  -  []  381.74 265.11 0 top
NOREF#821  -  []  339.65 205.86 90 top
NOREF#822  -  []  342.36 163.82 90 top
NOREF#823  -  []  175.7 218.65 90 top
NOREF#824  -  []  217.41 213.24 0 top
NOREF#825  -  []  112.41 195.15 0 top
NOREF#826  -  []  201.49 165.4 90 top
NOREF#827  -  []  385.36 194.18 90 top
NOREF#828  -  []  272.8 157.28 0 top
NOREF#829  -  []  338.11 288.86 0 top
NOREF#830  -  []  251.94 205.86 90 top
NOREF#831  -  []  352.25 189.82 0 top
NOREF#832  -  []  273.95 147.38 90 top
NOREF#833  -  []  322.23 173.13 0 top
NOREF#834  -  []  229.51 243.41 0 top
NOREF#835  -  []  184.47 187.92 90 top
NOREF#836  -  []  184.47 260.9 90 top
NOREF#837  -  []  167.7 151.68 90 top
NOREF#838  -  []  168.69 290.01 90 top
NOREF#839  -  []  110.47 171.02 0 top
NOREF#840  -  []  273.59 272.15 90 top
NOREF#841  -  []  254.29 265.56 90 top
NOREF#842  -  []  115.87 167.82 90 top
NOREF#843  -  []  172.08 289.11 90 top
NOREF#844  -  []  263.14 270.2 90 top
NOREF#845  -  []  106.11 234.24 0 top
NOREF#846  -  []  410.84 180.15 90 top
NOREF#847  -  []  119.7 238.84 0 top
NOREF#848  -  []  331.94 265.86 90 top
NOREF#849  -  []  184.47 227.72 90 top
NOREF#850  -  []  390.69 289.12 0 top
NOREF#851  -  []  165.8 226.57 0 top
NOREF#852  -  []  309.21 193.37 0 top
NOREF#853  -  []  274.37 147.93 90 top
NOREF#854  -  []  320.94 211.63 90 top
NOREF#855  -  []  397.55 209.41 90 top
NOREF#856  -  []  319.15 296.86 0 top
NOREF#857  -  []  184.89 159.1 90 top
NOREF#858  -  []  401.89 163.64 0 top
NOREF#859  -  []  254.29 264.35 90 top
NOREF#860  -  []  304.61 144.34 0 top
NOREF#861  -  []  392.73 154.88 0 top
NOREF#862  -  []  175.7 162.1 90 top
NOREF#863  -  []  239.4 296.61 0 top
NOREF#864  -  []  352.24 242.32 90 top
NOREF#865  -  []  201.23 217.55 90 top
NOREF#866  -  []  66.26 273.87 90 top
NOREF#867  -  []  405.42 131.94 90 top
NOREF#868  -  []  199.33 240.28 90 top
